# Altium PCB 400797.PcbDoc (part 4 of 8)
Units mm, origin at the board's own origin, x right, y up, seen from the top; angles counter-clockwise.
Board outline 155 x 63.5 mm, 4 copper layers (Top Layer, Mid-Layer 1, Mid-Layer 2, Bottom Layer), stack 1.514 mm thick; 333 components, 292 nets, 1555 pads, 2205 vias.
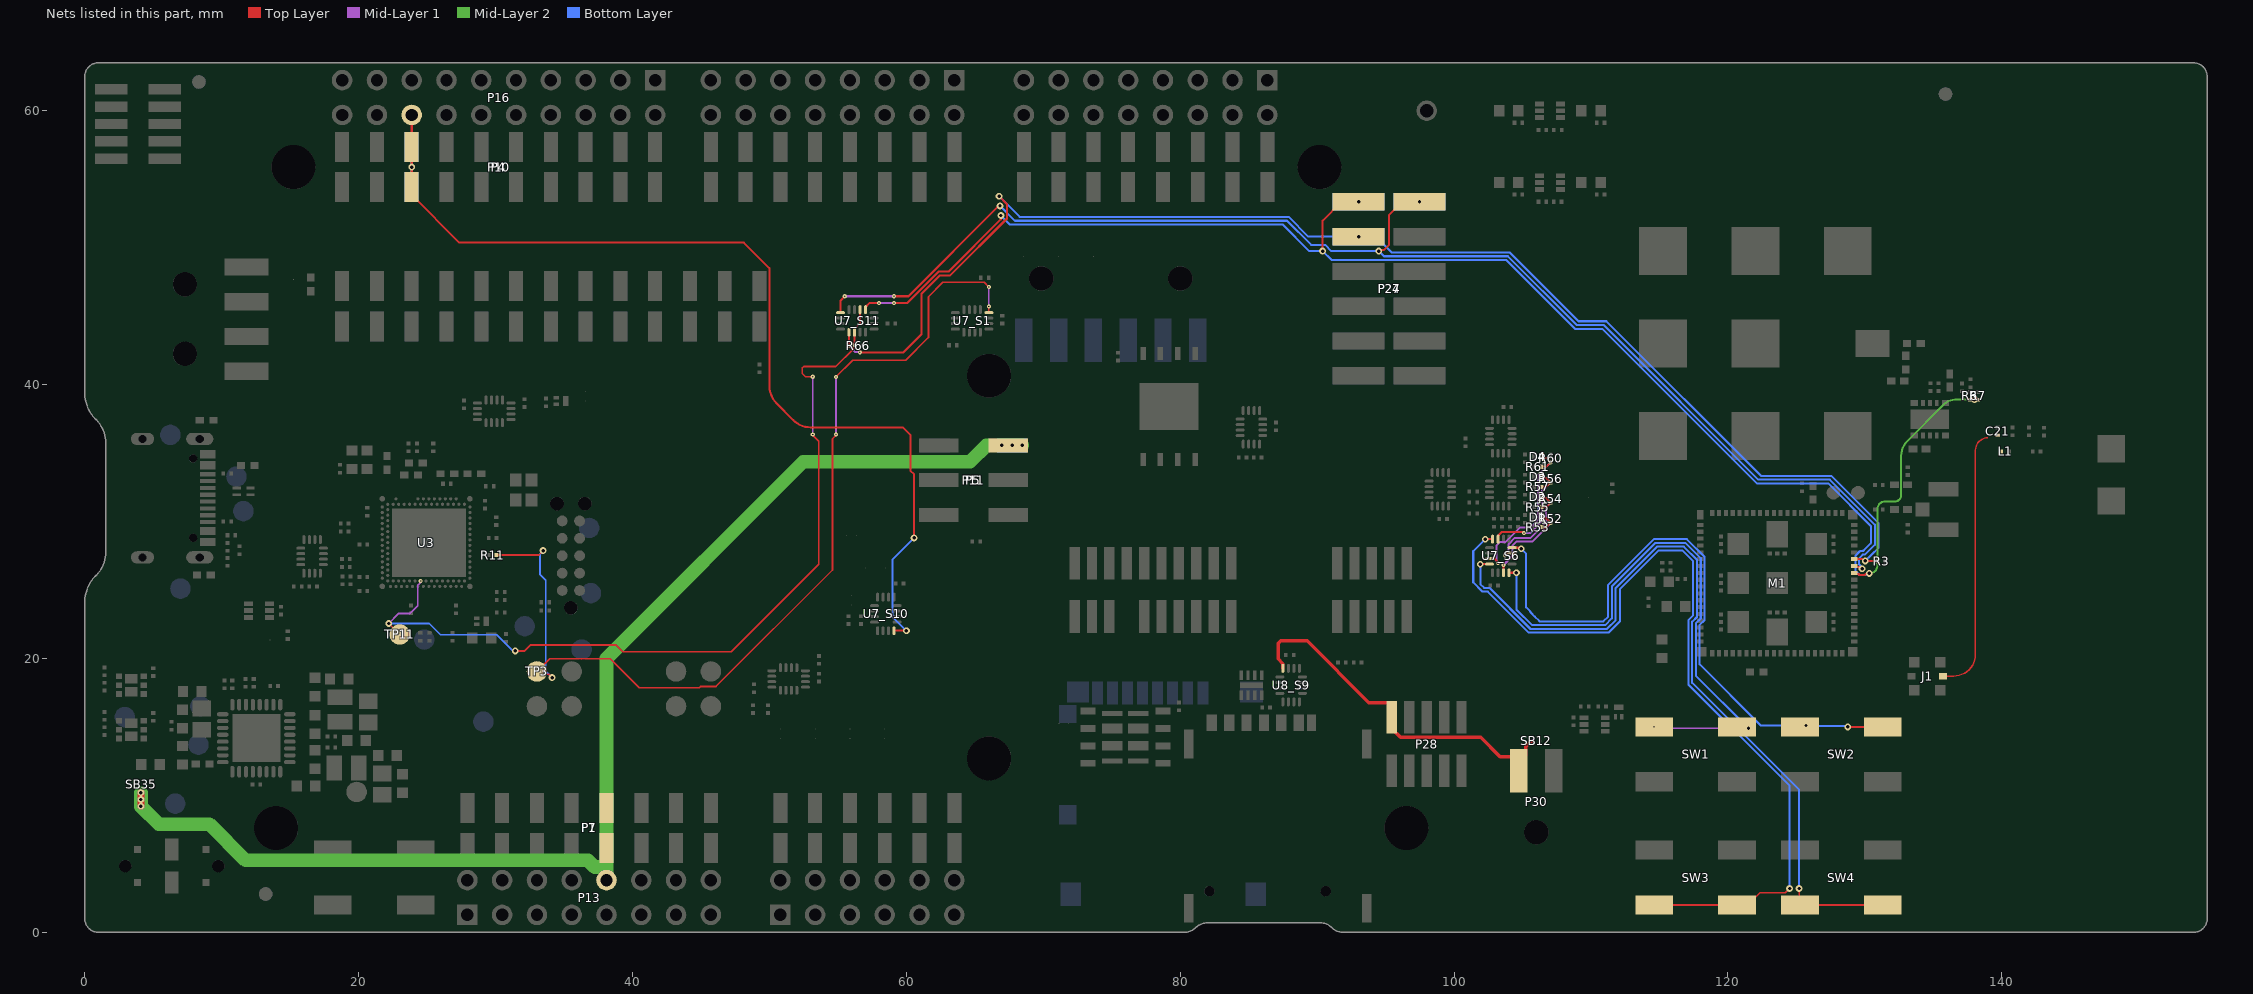
[diagram p4: the nets of this part, all layers, seen from the top]

## Via types
v1: diameter 0.5, hole 0.25, Top Layer to Bottom Layer, tented both sides, 1614 vias
v2: diameter 0.3, hole 0.1, Top Layer to Mid-Layer 1, tented top, 485 vias
v3: diameter 0.3, hole 0.1, Top Layer to Mid-Layer 1, tented both sides, 97 vias
v4: diameter 0.61, hole 0.305, Top Layer to Bottom Layer, tented both sides, 9 vias

## Nets (pads, with @x,y where several pads share a name; then routed paths per layer and width w, separated by ;. In a path a pad name is that pad's centre, name@x,y a point inside that pad or via, vN(x,y) a via of type N, cw(c..) or ccw(c..) an arc to the next point about the centre after c; other vN are vias at no path point)
5V: P1.5 P5.2 P7.5 P11.2 P13.10 SB35.2 | length 90.8
  Top Layer w0.5: v1(4.1,9.2) v1(4.1,9.7) v1(4.1,10.2)
  Mid-Layer 2 w1: v1(4.1,9.2) v1(4.1,9.7) v1(4.1,10.2) ; v1@4.107,9.193 5.4,7.9 9.1,7.9 11.748,5.252 36.748,5.252 37.235,4.765 38.1,4.765 ; P13.10@38.1,3.811 38.1,4.765 ; v1(68.472,35.561) v1(67.722,35.561) v1(66.972,35.561) 65.841,35.561 64.65,34.369 52.469,34.369 38.1,20 38.1,4.765
ANT: C21.2 J1.3 L1.1 | length 19.6
  Top Layer w0.1: J1.3@135.714,18.7 135.72,18.706 136.481,18.706 ccw(c136.481,20.3) 138.074,20.3 138.074,35.207 cw(c138.984,35.207) 138.984,36.117
AREF: P4.8 P10.8 P16.16 U7_S10.8 | length 74.8
  Top Layer w0.15: P16.16@23.876,59.691 P4.8@23.876,57.346 v1(23.876,55.881) P4.8@23.876,54.416 23.876,53.849 27.356,50.369 39.539,50.369 39.541,50.368 40.825,50.368 40.826,50.369 48.131,50.369 50,48.5 50,39.887 ccw(c51.8,39.887) 50.525,38.617 51.742,37.4 ccw(c53.012,38.675) 53.012,36.875 59.742,36.875 60.294,36.322 60.294,33.717 60.569,33.442 v1(60.569,28.808) ; U7_S10.8@59.1,22.025 v1(60,22.025) v1@60.086,22.025
  Bottom Layer w0.15: P10.8@23.876,53.849 v1(23.876,55.881) P10.8@23.876,57.346 ; v1(60,22.025) 59.989,22.025 58.975,23.039 58.975,27.213 v1(60.569,28.808)
BTN1_EXT: D1.1 R52.1 R53.2 U7_S6.15 | length 7.3
  Top Layer w0.15: U7_S6.15@103.61,26.259 v2(103.61,26.825) ; R53.2@106.399,29.581 106.723,29.581 v2(107.048,29.906) 106.723,30.231 D1.1@106.399,30.231
  Mid-Layer 1 w0.15: v2(103.61,26.825) 104.26,27.475 104.26,28.236 104.548,28.525 105.71,28.525 107.048,29.863 v2(107.048,29.906)
BTN2_EXT: D2.1 R54.1 R55.2 U7_S6.3 | length 8
  Top Layer w0.15: v2(103.714,27.539) 103.859,27.684 U7_S6.3@104.235,27.684 ; R55.2@106.399,31.055 106.723,31.055 v2(107.048,31.379) 106.723,31.704 D2.1@106.399,31.704
  Mid-Layer 1 w0.15: v2(103.714,27.539) 103.985,27.81 103.985,28.35 104.435,28.8 105.596,28.8 106.698,29.902 106.698,31.029 v2(107.048,31.379)
BTN3_EXT: D3.1 R56.1 R57.2 U7_S6.7 | length 8.6
  Top Layer w0.15: U7_S6.7@103.21,28.709 103.21,28.962 103.481,29.234 104.646,29.234 104.652,29.228 105.032,29.228 v2(105.11,29.15) ; R57.2@106.399,32.528 106.723,32.528 v2(107.048,32.852) 106.723,33.177 D3.1@106.399,33.177
  Mid-Layer 1 w0.15: v2(105.11,29.15) 105.557,29.15 106.423,30.016 106.423,32.227 v2(107.048,32.852)
BTN4_EXT: D4.1 R60.1 R61.2 U7_S6.11 | length 12.1
  Top Layer w0.15: U7_S6.11@102.585,27.284 102.951,27.284 103.21,27.025 v2(103.21,26.975) ; R61.2@106.399,34.001 106.723,34.001 v2(107.048,34.326) 106.723,34.65 D4.1@106.399,34.65
  Mid-Layer 1 w0.15: v2(103.21,26.975) 103.085,27.1 103.085,28.229 103.348,28.493 103.721,28.493 103.73,28.484 104.802,29.556 105.574,29.556 106.148,30.13 106.148,33.426 v2(107.048,34.326)
BUTTON1: SW1.2 U7_S6.16 | length 42.6
  Top Layer w0.152: U7_S6.16@104.01,26.259 v1(104.547,26.259)
  Mid-Layer 1 w0.125: v2(114.6,15) 114.647,15 114.747,14.9 v1(121.5,14.9)
  Bottom Layer w0.15: v1(104.547,26.259) 104.547,23.576 105.694,22.428 111.028,22.428 111.525,22.925 111.525,25.256 114.708,28.438 116.889,28.438 118.013,27.315 118.013,22.913 117.662,22.563 117.662,18.738 v1(121.5,14.9)
BUTTON2: SW2.2 U7_S6.4 | length 45.6
  Top Layer w0.125: v1(128.75,15) SW2.2@130.665,15
  Top Layer w0.152: U7_S6.4@104.235,28.084 v1@104.904,28.084
  Bottom Layer w0.15: v1(104.904,28.009) 105.267,27.647 105.267,23.734 105.562,23.438 ccw(c105.687,23.439) 105.599,23.351 105.905,23.045 106.211,22.739 ccw(c106.299,22.828) 106.298,22.703 110.903,22.703 111.25,23.05 111.25,25.37 114.594,28.713 117.003,28.713 118.288,27.429 118.288,22.8 117.937,22.45 117.937,19.564 122.401,15.1 v1(125.7,15.1) 125.75,15.05 128.7,15.05 v1(128.75,15)
BUTTON3: SW3.2 U7_S6.8 | length 63.1
  Top Layer w0.125: SW3.2@114.815,2 SW3.2@120.665,2 121.45,2 122.338,2.888 124.188,2.888 v1(124.5,3.2)
  Top Layer w0.152: v1(102.273,28.709) U7_S6.8@102.81,28.709
  Bottom Layer w0.15: v1(102.273,28.709) 101.4,27.836 101.4,25.552 102.077,24.875 102.47,24.875 105.467,21.878 111.278,21.878 112.1,22.7 112.1,25.05 114.938,27.888 116.661,27.888 117.463,27.087 117.463,23.141 117.112,22.791 117.112,18.099 124.5,10.711 v1(124.5,3.2)
BUTTON4: SW4.2 U7_S6.12 | length 58.1
  Top Layer w0.125: SW4.2@125.115,2 125.2,2.085 v1(125.2,3.2) ; SW4.2@125.265,2 SW4.2@131.165,2
  Top Layer w0.152: v1(101.915,26.884) U7_S6.12@102.585,26.884
  Bottom Layer w0.15: v1(101.915,26.884) 101.915,25.426 102.191,25.15 102.583,25.15 105.58,22.153 111.153,22.153 111.8,22.8 111.8,25.142 114.822,28.163 116.775,28.163 117.738,27.201 117.738,23.027 117.387,22.677 117.387,18.213 125.2,10.4 v1(125.2,3.2)
COEX0: M1.52 P24.1 P27.1 R6.1 R7.2 U7_S11.1 | length 114.5
  Top Layer w0.15: U7_S11.1@57.018,45.475 57.018,45.668 57.3,45.95 v2(58,45.95) ; v2(59.1,45.95) 60.043,45.95 62.343,48.25 63.08,48.25 66.9,52.07 v1(66.9,52.35) ; v1(90.4,49.75) 90.4,51.975 P24.1@91.766,53.341 ; M1.52@129.225,26.25 129.3,26.175 129.53,26.175 129.609,26.097 129.982,26.097 130.032,26.147 130.257,26.147 v1(130.324,26.214) ; R6.1@137.675,38.887 137.681,38.894 137.994,38.894 v1(138,38.9) ; v1@137.987,38.887 R7.2@138.25,38.887
  Mid-Layer 1 w0.15: v2(58,45.95) v2(59.1,45.95)
  Mid-Layer 2 w0.15: v1(130.324,26.214) ccw(c130.335,26.804) 130.925,26.804 130.925,30.925 cw(c131.466,30.925) 131.466,31.466 132.189,31.466 ccw(c132.191,31.925) 132.65,31.926 132.65,34.801 cw(c134.153,34.802) 133.084,35.859 135.803,38.578 ; 135.804,38.579 cw(c136.575,37.813) 136.576,38.9 v1(138,38.9)
  Bottom Layer w0.15: v1(66.9,52.35) 67.559,51.691 87.495,51.691 89.436,49.75 v1(90.4,49.75) 91.054,49.096 103.808,49.096 108.829,44.075 110.814,44.075 122.106,32.783 127.32,32.783 130.45,29.653 130.45,28.487 cw(c130.3,28.487) 130.406,28.381 129.919,27.894 cw(c129.813,28) 129.813,27.85 129.712,27.85 ccw(c129.712,27.7) 129.606,27.806 129.348,27.548 ccw(c129.455,27.443) 129.305,27.443 129.305,26.401 129.609,26.097 130.112,26.097 130.23,26.214 v1(130.324,26.214)
  other v1: 93.028,53.341
COEX1: M1.53 P24.2 P27.2 U7_S11.5 | length 99.2
  Top Layer w0.15: U7_S11.5@55.193,45.25 55.193,46.143 v2(55.5,46.45) ; v2(59.1,46.45) 60.154,46.45 66.754,53.05 v1(66.836,53.05) ; v1(94.5,49.75) 94.567,49.817 94.866,49.817 95.254,50.205 95.254,52.393 96.203,53.341 v1(97.473,53.341) ; M1.53@129.225,26.75 129.3,26.75 129.375,26.675 129.572,26.675 129.7,26.547 v1(129.795,26.547)
  Mid-Layer 1 w0.15: v2(55.5,46.45) v2(59.1,46.45)
  Bottom Layer w0.15: v1(66.836,53.05) 67.92,51.966 87.798,51.966 89.564,50.2 90.586,50.2 91.036,49.75 v1(94.5,49.75) 94.513,49.75 94.513,49.737 94.879,49.371 103.922,49.371 108.943,44.35 110.928,44.35 122.22,33.058 127.434,33.058 130.725,29.767 130.725,28.3 130,27.575 129.842,27.575 129.58,27.312 129.58,26.857 129.795,26.641 v1(129.795,26.547)
COEX2: M1.54 P24.3 P27.3 R3.2 U7_S11.9 | length 99.4
  Top Layer w0.15: v2(55.805,42.825) 55.812,42.832 55.812,43.819 U7_S11.9@55.818,43.825 ; v2(56.6,42.363) 56.613,42.35 59.793,42.35 61.1,43.657 61.1,46.618 62.457,47.975 63.194,47.975 67.35,52.131 67.35,53.173 v1(66.773,53.75) ; M1.54@129.225,27.25 129.811,27.25 129.935,27.126 v1(130.03,27.126) 130.043,27.113 130.902,27.113 R3.2@130.915,27.1
  Mid-Layer 1 w0.15: v2(55.805,42.825) 56.239,42.391 56.571,42.391 v2(56.6,42.363)
  Bottom Layer w0.15: v1(66.773,53.75) 68.281,52.242 87.911,52.242 89.352,50.801 v1(93.028,50.801) 94.298,50.801 95.452,49.646 104.063,49.646 109.084,44.625 111.119,44.625 122.411,33.333 127.547,33.333 131,29.881 131,28.096 130.419,27.515 v1(130.03,27.126)
COEX_SELECT: R66.2 TP11.1 U3.AK14 U7_S11.2 U7_S11.10 | length 63.5
  Top Layer w0.125: v1(22.2,22.55) TP11.1@23,21.75 ; v1(31.436,20.55) 32.134,20.55 32.571,20.988 38.78,20.988 39.28,20.488 47.216,20.488 53.6,26.871 53.6,35.86 53.162,36.298 v2(53.162,36.35) ; v2(53.162,40.575) 52.63,40.575 52.4,40.805 52.4,41.225 52.5,41.325 54.85,41.325 56.145,42.62 56.145,42.777 56.218,42.85 U7_S11.10@56.218,43.825 56.218,44.068 56.618,44.468 U7_S11.2@56.618,45.475
  Mid-Layer 1 w0.125: v1(22.2,22.55) 22.937,23.288 23.769,23.288 24.325,23.843 24.325,25.347 v2@24.525,25.547 ; v2@24.49,25.582 24.525,25.617 v2(24.525,25.659) ; v2(53.162,36.35) v2(53.162,40.575)
  Bottom Layer w0.125: v1(22.2,22.55) 24.279,22.55 25.15,22.55 25.975,21.725 30.075,21.725 31.25,20.55 v1(31.436,20.55)
COM.CH1_S1: R11.2 TP3.1 U7_S1.16 | length 73
  Top Layer w0.125: R11.2@30.06,27.55 33.175,27.55 33.475,27.85 v1(33.475,27.875) ; v1(34.125,18.6) 33.875,18.85 33.22,18.85 TP3.1@33.02,19.05 33.958,19.988 38.366,19.988 40.491,17.863 44.887,17.863 44.973,17.948 46.09,17.948 54.6,26.457 54.6,36.035 54.863,36.298 v2(54.863,36.35) ; v2(54.863,40.55) 54.863,40.565 56.073,41.775 59.943,41.775 61.612,43.445 61.612,46.406 62.669,47.463 65.688,47.463 v2(66.025,47.125) ; U7_S1.16@66.025,45.25 v2(66.025,45.7)
  Mid-Layer 1 w0.125: v2(54.863,36.35) v2(54.863,40.55) v2@54.863,40.575 ; v2(66.025,45.7) v2(66.025,47.125)
  Bottom Layer w0.125: v1(33.475,27.875) 33.25,27.65 33.25,26.117 33.663,25.704 33.663,19.063 v1(34.125,18.6)
COM.CH1_S9: P28.2 P30.1 SB12.2 U8_S9.16 | length 26.5
  Top Layer w0.254: U8_S9.16@87.5,19.275 87.498,19.277 87.498,19.615 87.148,19.965 87.148,21.093 87.342,21.287 89.266,21.287 93.778,16.775 95.46,16.775 P28.2@95.46,15.7 95.46,14.865 96.088,14.237 101.942,14.237 103.353,12.825 104.73,12.825 P30.1@104.73,11.8 ; P30.1@105.237,12.928 105.237,13.549 105.688,14